# Altium PCB LED.PcbDoc
Units mm, origin at the board's own origin, x right, y up, seen from the top; angles counter-clockwise.
Board outline 20 x 20 mm, 2 copper layers (Top Layer, Bottom Layer), stack 1.671 mm thick; 9 components, 6 nets, 18 pads, 1 vias.
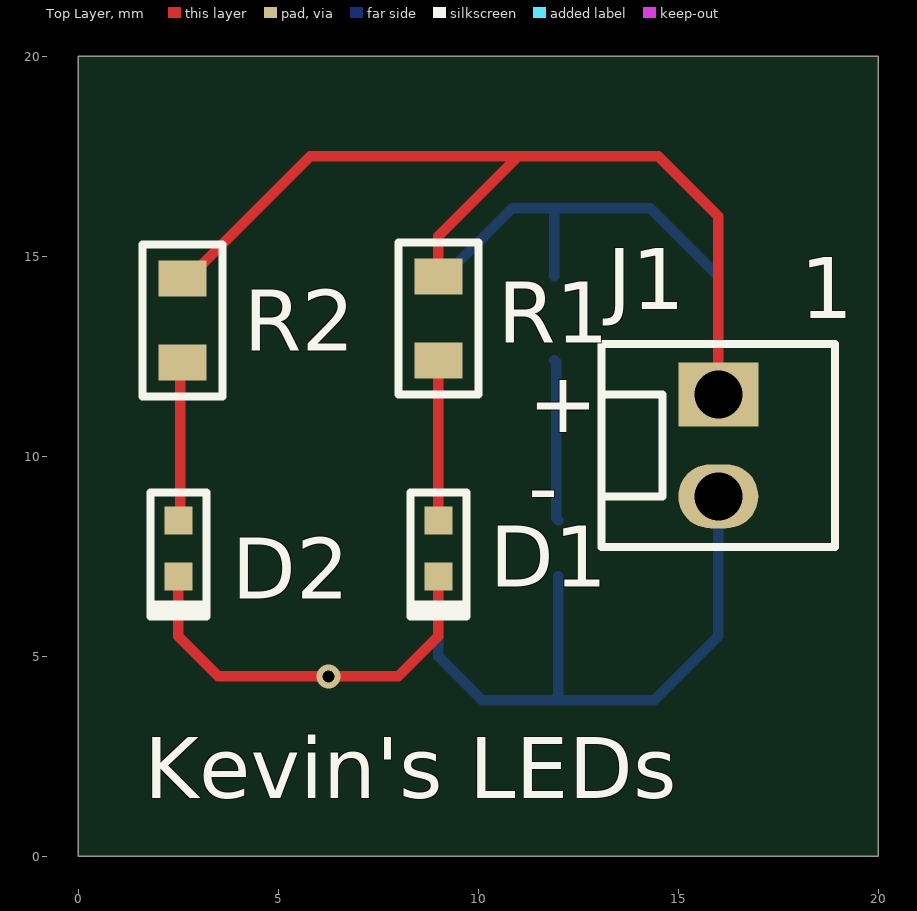
[diagram p0: Top Layer view]
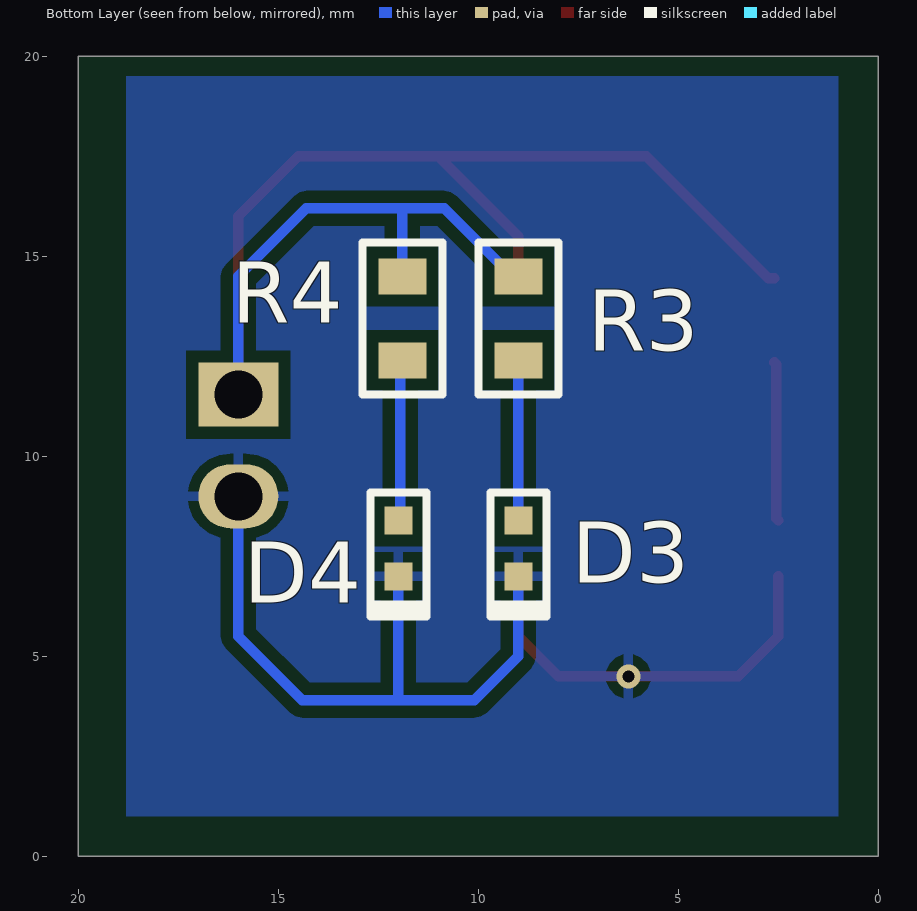
[diagram p1: Bottom Layer view, seen from below]
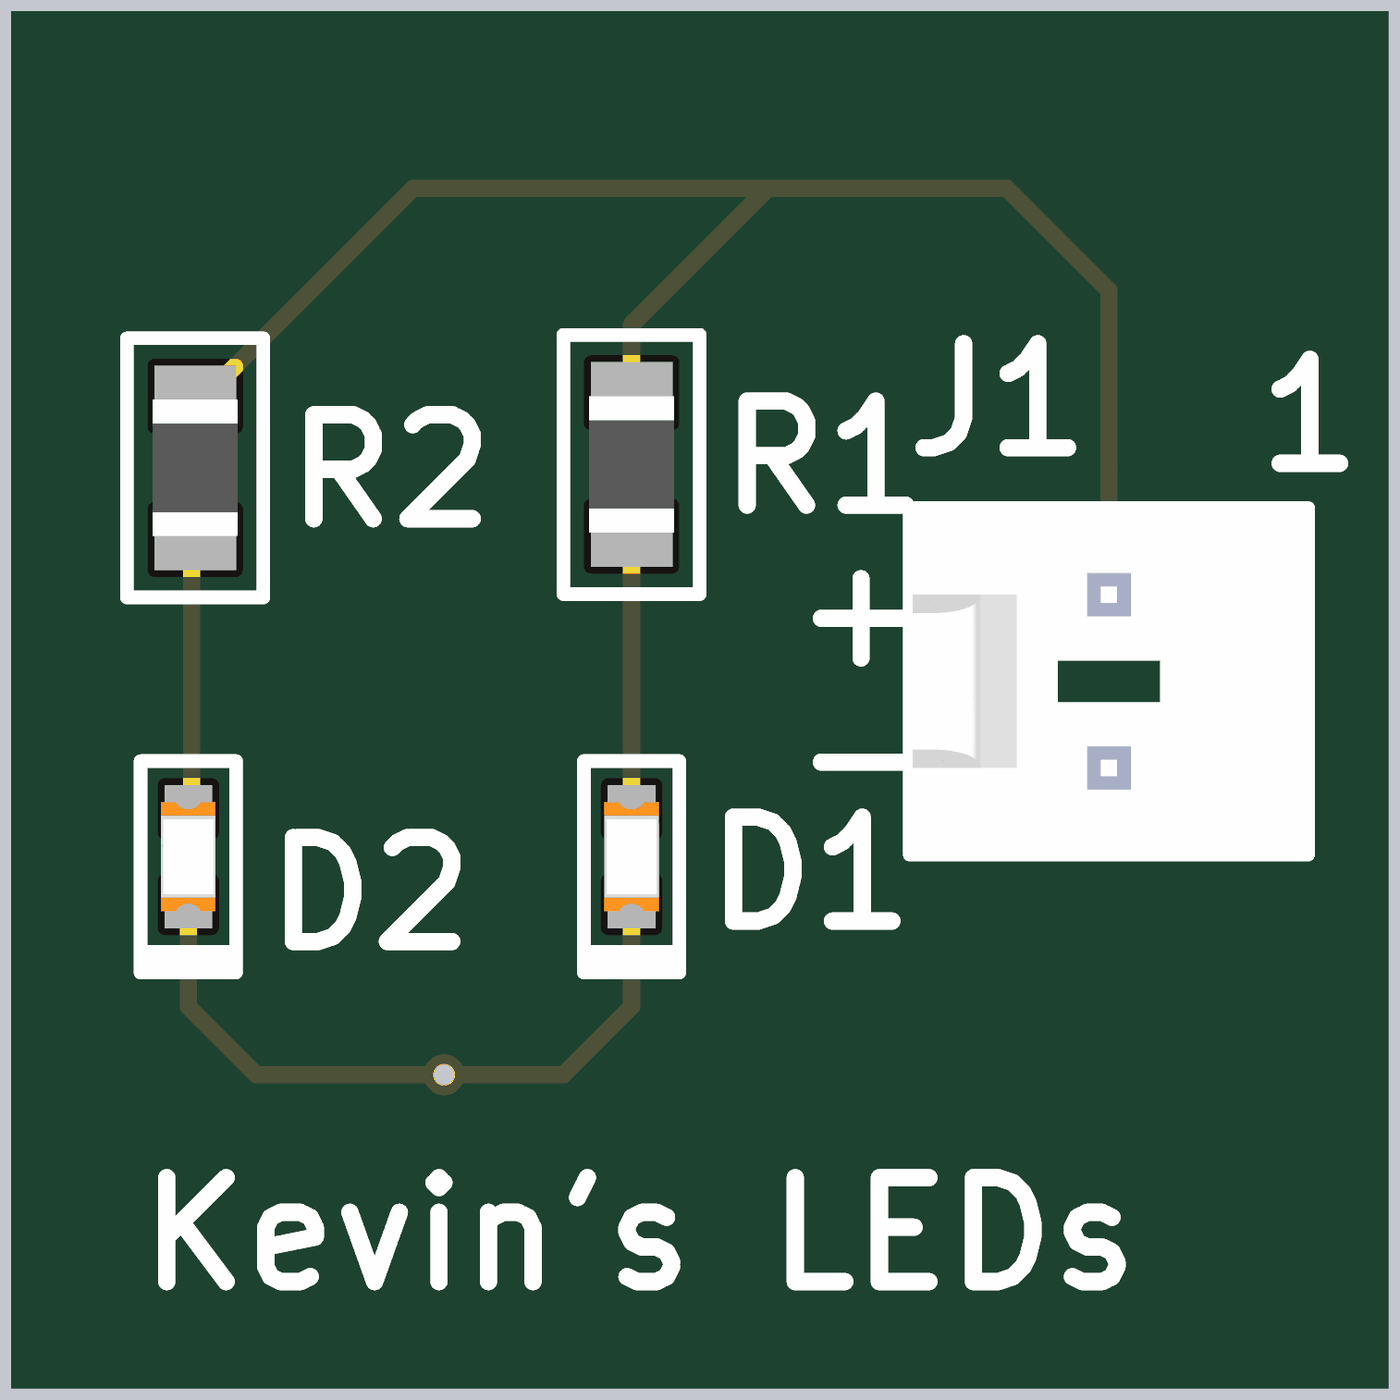
[diagram p2: 3D render of the assembled board from above, using the file's embedded part models]
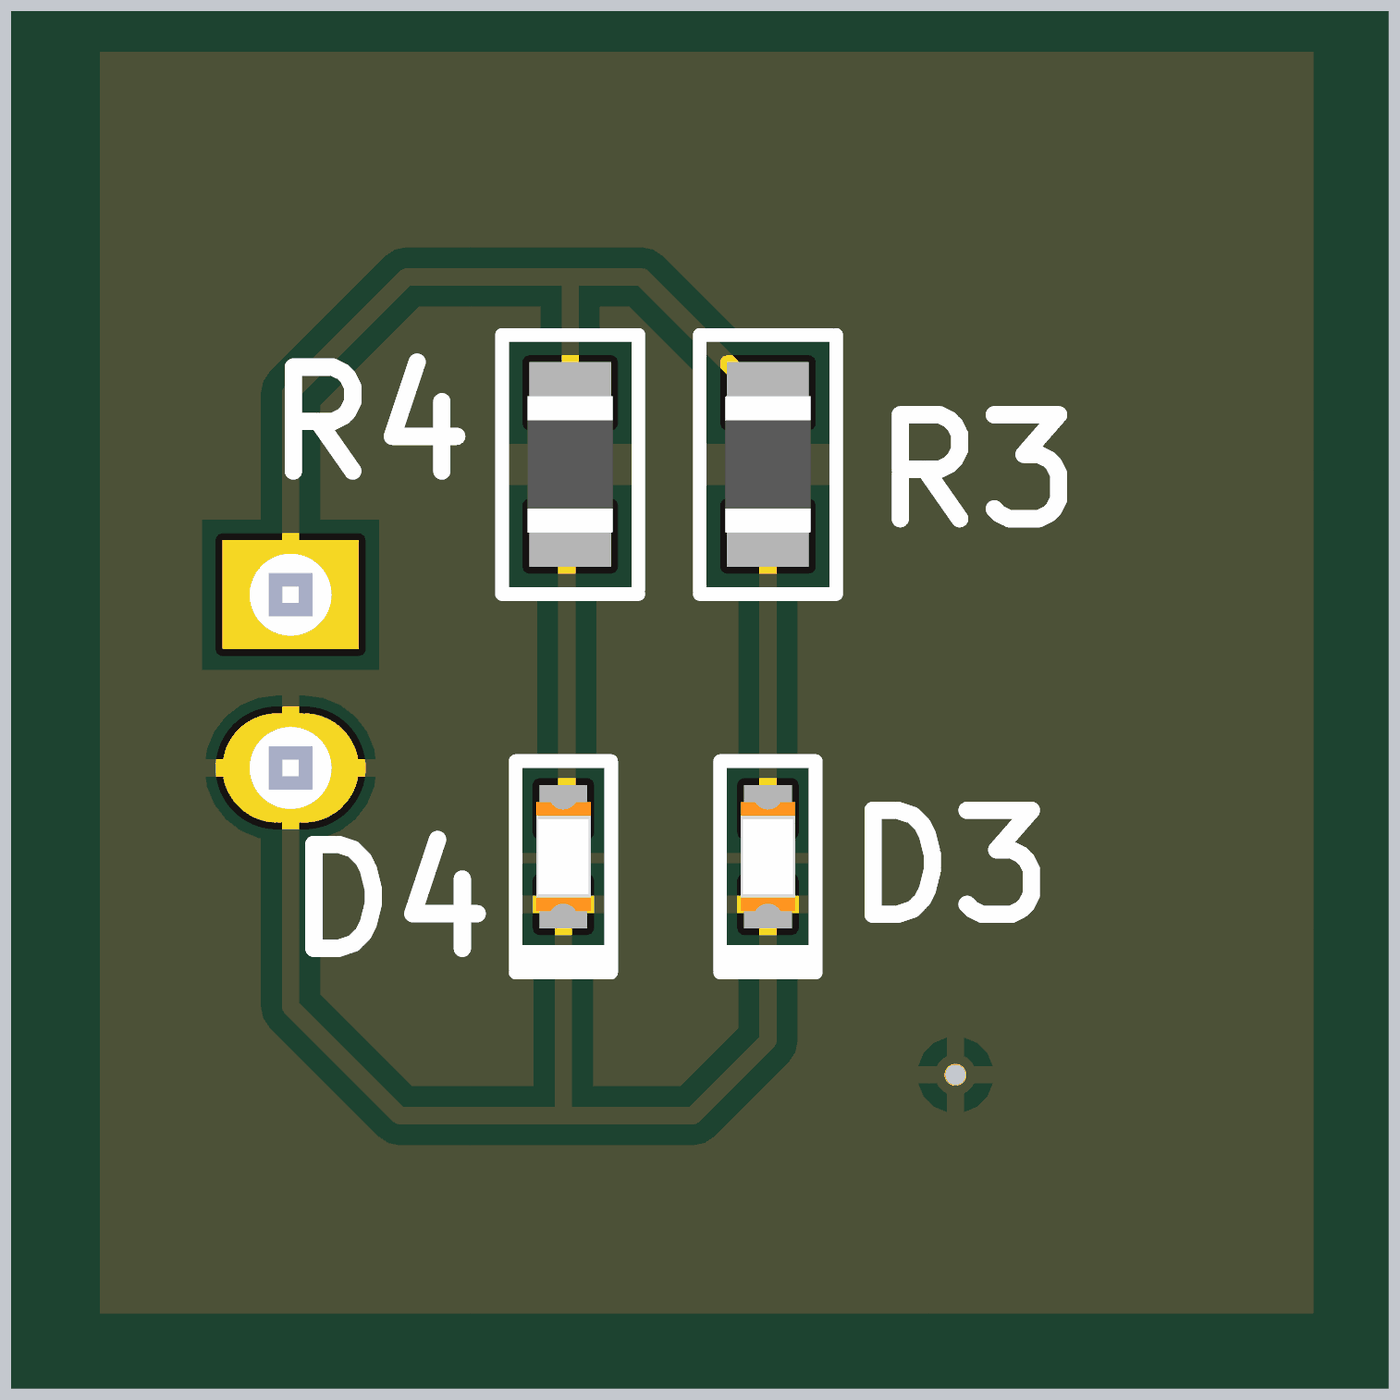
[diagram p3: 3D render of the assembled board from below, using the file's embedded part models]

## Layer stack, top to bottom
Top Solder: solder mask 0.0102, Solder Resist, Dk 3.5
Top Layer: signal copper 0.0356
Dielectric 1: dielectric 1.6, FR-4, Dk 4.8
Bottom Layer: signal copper 0.0356
Bottom Solder: solder mask 0.0102, Solder Resist, Dk 3.5

## Board outline
0,20 20,20 20,0 0,0

## Design rules (kind name [scope] priority, off if disabled: settings)
Clearance Clearance_1 [OnMid vs OnMid] p1: gap=0.3 ignorepadtopadclearanceinfootprint=FALSE sourcerule=37 cellrowname=All cellrowtype=0 cellcolname=All cellcoltype=0 innerlayers=TRUE
Clearance Clearance_2 [(ExistsOnLayer('Top Layer') Or ExistsOnLayer('Bottom Layer')) vs (ExistsOnLayer('Top Layer') Or ExistsOnLayer('Bottom Layer'))] p2: gap=0.3 ignorepadtopadclearanceinfootprint=FALSE sourcerule=37 cellrowname=All cellrowtype=0 cellcolname=All cellcoltype=0 outerlayers=TRUE
Clearance [All] p3: gap=0.254 ignorepadtopadclearanceinfootprint=FALSE except(0: Arc-Hole Track-Hole SMDPad-Hole THPad-Hole Via-Hole Fill-Hole Poly-Hole Region-Hole Text-Hole)
PolygonConnect [All] p1: connectstyle=Relief reliefconductorwidth=0.254 reliefentries=4 polygonreliefangle="90 Angle" airgapwidth=0.254
RoutingVias RoutingViaStyle_1 [All] p1: holewidth=0.3 width=0.6 viastyle="Through Hole" minholewidth=0.3 minwidth=0.6 maxholewidth=0.3 maxwidth=0.6
RoutingVias [All] p2: holewidth=0.711 width=1.27 viastyle="Through Hole" minholewidth=0.711 minwidth=1.27 maxholewidth=0.711 maxwidth=1.27
SilkToSolderMaskClearance [IsPad] p1: minsilkscreentomaskgap=0.1 clearancetoexposedcopper=TRUE
SolderMaskExpansion [All] p1: expansion=0.102 istentingtop=FALSE
Width Width_1 [All] p1: maxlimit=0.254 minlimit=0.254 preferedwidth=0.254
29 further rules are at their usual default settings.

## Components (designator, comment, footprint, x,y, rotation, side; value= is the part's Value field where it differs from the comment)
D1 "GREEN" LED0603G 9,7.7 r90 top
D2 "GREEN" LED0603G 2.5,7.7 r90 top
D3 "GREEN" LED0603G 9,7.7 r90 bottom
D4 "GREEN" LED0603G 12,7.7 r90 bottom
J1 "1x2 Header" HDR1x2 16,11.54 r0 top
R1 "360R" R0805 9,13.45 r90 top
R2 "360R" R0805 2.6,13.4 r90 top
R3 "360R" R0805 9,13.45 r90 bottom
R4 "360R" R0805 11.9,13.45 r90 bottom

## Footprints (in the part's own frame and the unit in brackets; to place one, negate y for a bottom-side part, rotate by r counter-clockwise, add the part's x,y. Pads: shape width x height; smd on the part's side, far side on the other; paste and mask are expansions set on the pad)
HDR1x2 [mm]
  rect 2x1.6 hole 1.2: 1(0,0)
  oval 2x1.6 hole 1.2: 2(0,-2.54)
  silkscreen extent -2.92,-3.81 2.92,1.27, body extent -2.88,-3.81 2.92,1.27, height 11.71
LED0603G [mm]
  rect 0.7x0.7 smd: 1(-0.7,0) 2(0.7,0)
  silkscreen extent -1.7,-0.7 1.4,0.7, body extent -0.8,-0.4 0.8,0.4, height 0.59
R0805 [mm]
  rect 0.9x1.2 smd: 1(-1.05,0) 2(1.05,0)
  silkscreen extent -1.9,-1 1.9,1, body extent -1,-0.63 1,0.63, height 0.61

## Part data
D1 D2 D3 D4: library part LSM0603453V, "Single Color LED", Manufacturer="Visual Communications", Supplier Part Number=LSM0603453VCT-ND, Category=LEDs, ComponentLink1Description=https://datasheet.ciiva.com:443/pdfs/VipMasterIC/IC/VISU/VISU-S-A0009188582/VISU-S-A0009188582-1.pdf?src-supplier=IHS+Markit, ComponentLink1URL=https://datasheet.ciiva.com:443/pdfs/VipMasterIC/IC/VISU/VISU-S-A0009188582/VISU-S-A0009188582-1.pdf?src-supplier=IHS+Markit, ComponentLink2Description=http://www.farnell.com/datasheets/2699708.pdf?src-supplier=Farnell, ComponentLink2URL=http://www.farnell.com/datasheets/2699708.pdf?src-supplier=Farnell, ComponentLink3Description=http://www.farnell.com/datasheets/2699708.pdf?src-supplier=Newark, ComponentLink3URL=http://www.farnell.com/datasheets/2699708.pdf?src-supplier=Newark, ComponentLink4Description=https://vcclite.com/wp-content/uploads/wpallimport/files/files/LSM0603453V.pdf?src-supplier=Digi-Key, ComponentLink4URL=https://vcclite.com/wp-content/uploads/wpallimport/files/files/LSM0603453V.pdf?src-supplier=Digi-Key, Manufacturer Part Number=LSM0603453V, Optoelectronic Device Type="SINGLE COLOR LED", Pricing="1=0.46, 10=0.283, 100=0.1626, 1000=0.12726, 2000=0.11666 (USD)", Reach SVHC Compliant=Yes, RoHS=Yes, RoHS Compliant=Yes, Stock=93850, Supplier=Digi-Key
J1: library part 22-27-2021, "CONN HEADER VERT 2POS 2.54MM", Contact Resistance=10mR, Flammability Rating="UL94 V-0", Insulation Color=White, Insulation Resistance=1GR, Manufacturer=Molex, Max Operating Temperature=75°C, Min Operating Temperature=0°C, Rated Current (Signal)=4A, Supplier Part Number=WM4111-ND, Body Breadth=0.23inch, Body Depth=0.46inch, Body Length=0.2inch, Body/Shell Style=RECEPTACLE, Category="Headers and Wire Housings", ComponentLink1Description=https://datasheet.ciiva.com:443/pdfs/VipMasterIC/IC/MOLE/MOLE-E-A0003552261/MOLE-S-A0003534498-1.pdf?src-supplier=IHS+Markit, ComponentLink1URL=https://datasheet.ciiva.com:443/pdfs/VipMasterIC/IC/MOLE/MOLE-E-A0003552261/MOLE-S-A0003534498-1.pdf?src-supplier=IHS+Markit, Connector Type="BOARD CONNECTOR", Contact Finish - Mating="NOT SPECIFIED", Contact Finish - Termination="Bright Tin (Sn)", Contact Gender=Male, Contact Material=Brass, Contact Pattern=RECTANGULAR, Contact Style="SQ PIN-SKT", DIN Conformance=No, Durability=25Cycles, Filter Feature=No, IEC Conformance=No, Insulation Material=Nylon, JESD-609 Code=e3, Manufacturer Part Number=22-27-2021, Mating Contact Pitch=0.1inch, Mating Information="MULTIPLE MATING PARTS AVAILABLE", MIL Conformance=No, Mixed Contacts=No, Mounting Option 1=LOCKING, Mounting Style=STRAIGHT, Mounting Technology=Board, Number Of Connectors=1, Number of Contacts=2, Number Of PCB Rows=1, Number of Rows Loaded=1, Option="General Purpose", PCB Contact Pattern=RECTANGULAR, Plating Thickness=100uin, Polarization Key="POLARIZED HOUSING", Pricing="1=0.3, 10=0.245, 100=0.18, 1000=0.14317, 5000=0.12272, 10000=0.11453 (USD)", Reach SVHC Compliant=Yes, Reference Standard=UL, Reliability=COMMERCIAL, RoHS=Yes, RoHS Compliant=Yes, Stock=93802, Supplier=Digi-Key, Terminal Length=0.14inch, Terminal Pitch=2.54mm, Termination=Solder
R1 R2 R3 R4: library part AC0805FR-07360RL, "RES SMD 360 OHM 1% 1/8W 0805", Case/Package=0805, Manufacturer=Yageo, Max Operating Temperature=155°C, Min Operating Temperature=-55°C, Package Height=0.5mm, Package Length=2mm, Package Shape=Rectangular, Package Style=SMTMeter, Package Width=1.25mm, Power=125mW, Rated Temperature=70°C, Resistor Type="FIXED RESISTOR", Supplier Part Number=13-AC0805FR-07360RLCT-ND, Temperature Coefficient=100ppm/°C, Tolerance=1%, Working Voltage=150V, Additional Feature="LASER TRIMMABLE", Category="Chip SMD Resistors", ComponentLink1Description=https://datasheet.ciiva.com:443/pdfs/VipMasterIC/IC/YAGO/YAGO-S-A0003597364/YAGO-S-A0003597364-1.pdf?src-supplier=IHS+Markit, ComponentLink1URL=https://datasheet.ciiva.com:443/pdfs/VipMasterIC/IC/YAGO/YAGO-S-A0003597364/YAGO-S-A0003597364-1.pdf?src-supplier=IHS+Markit, ComponentLink2Description=http://www.yageo.com/NewPortal/yageodocoutput?fileName=/pdf/R-Chip/PYu-AC_51_RoHS_L_6.pdf&src-supplier=Digi-Key, ComponentLink2URL=http://www.yageo.com/NewPortal/yageodocoutput?fileName=/pdf/R-Chip/PYu-AC_51_RoHS_L_6.pdf&src-supplier=Digi-Key, Construction=Chip, JESD-609 Code=e3, Manufacturer Part Number=AC0805FR-07360RL, Mounting Technology="Surface Mount", Packaging="Tape and Reel", Pins=2, Pricing="1=0.1, 10=0.031, 50=0.0198, 100=0.0166, 500=0.01152, 1000=0.00997 (USD)", Reach SVHC Compliant=Yes, Reference Standard=AEC-Q200, RoHS=Yes, RoHS Compliant=Yes, Stock=5000, Supplier=Digi-Key, Technology="METAL GLAZE/THICK FILM", Terminal Finish=Nickel, Termination=Wraparound

## Via types
v1: diameter 0.6, hole 0.3, Top Layer to Bottom Layer, tented both sides, 1 vias

## Nets (pads, with @x,y where several pads share a name; then routed paths per layer and width w, separated by ;. In a path a pad name is that pad's centre, name@x,y a point inside that pad or via, vN(x,y) a via of type N, cw(c..) or ccw(c..) an arc to the next point about the centre after c; other vN are vias at no path point)
+3V3: J1.1 R1.2 R2.2 R3.2 R4.2 | length 36.6
  Top Layer w0.254: R2.2 2.75,14.45 5.8,17.5 11,17.5 ; R1.2 9,15.5 11,17.5 ; J1.1 16,16 14.5,17.5 11,17.5
  Bottom Layer w0.254: R3.2 9.15,14.5 10.85,16.2 11.9,16.2 ; R4.2 11.9,16.2 ; J1.1 16,14.5 14.3,16.2 11.9,16.2
DIODE1: D1.2 R1.1 | length 4
  Top Layer w0.254: D1.2 R1.1
DIODE2: D2.2 R2.1 | length 4
  Top Layer w0.254: D2.2 2.55,8.45 2.55,12.3 R2.1
DIODE3: D3.2 R3.1 | length 4
  Bottom Layer w0.254: D3.2 R3.1
DIODE4: D4.2 R4.1 | length 4
  Bottom Layer w0.254: R4.1 11.95,12.35 11.95,8.45 D4.2
GND: D1.1 D2.1 D3.1 D4.1 J1.2 | length 27
  Top Layer w0.254: D2.1 2.5,5.5 3.5,4.5 v1(6.25,4.5) 8,4.5 9,5.5 D1.1
  Bottom Layer w0.254: D3.1 9,5 10.1,3.9 12,3.9 ; D4.1 12,3.9 ; J1.2 16,5.5 14.4,3.9 12,3.9

## Polygon pours and split planes (outlines as drawn)
GND on Bottom Layer "GND_L02_P000" (solid, pour order 0): 1,1 18.8,1 18.8,19.5 1,19.5

## Silkscreen, mask and mechanical layers (free items; w line width, h text height)
Top Overlay:
  text "+" at 11.254,10.6 h1.52
  text "-" at 11.254,8.492 h1.52
  text "Kevin's LEDs" at 1.654,1.454 h1.52
Board:
  the board outline again, w0.2

## Text inside footprints (layer, text, board x,y; h text height)
J1: Top Overlay "1" at 18.054,13.454 h1.52